# Altium PCB PX4FMUv2.4.6.PcbDoc (part 3 of 3)
Units mil, origin at the board's own origin, x right, y up, seen from the top; angles counter-clockwise.
Board outline 2695 x 2965 mil, 2 copper layers (Top, Bottom), stack 12.756 mil thick; 257 components, 261 nets, 1127 pads, 374 vias.
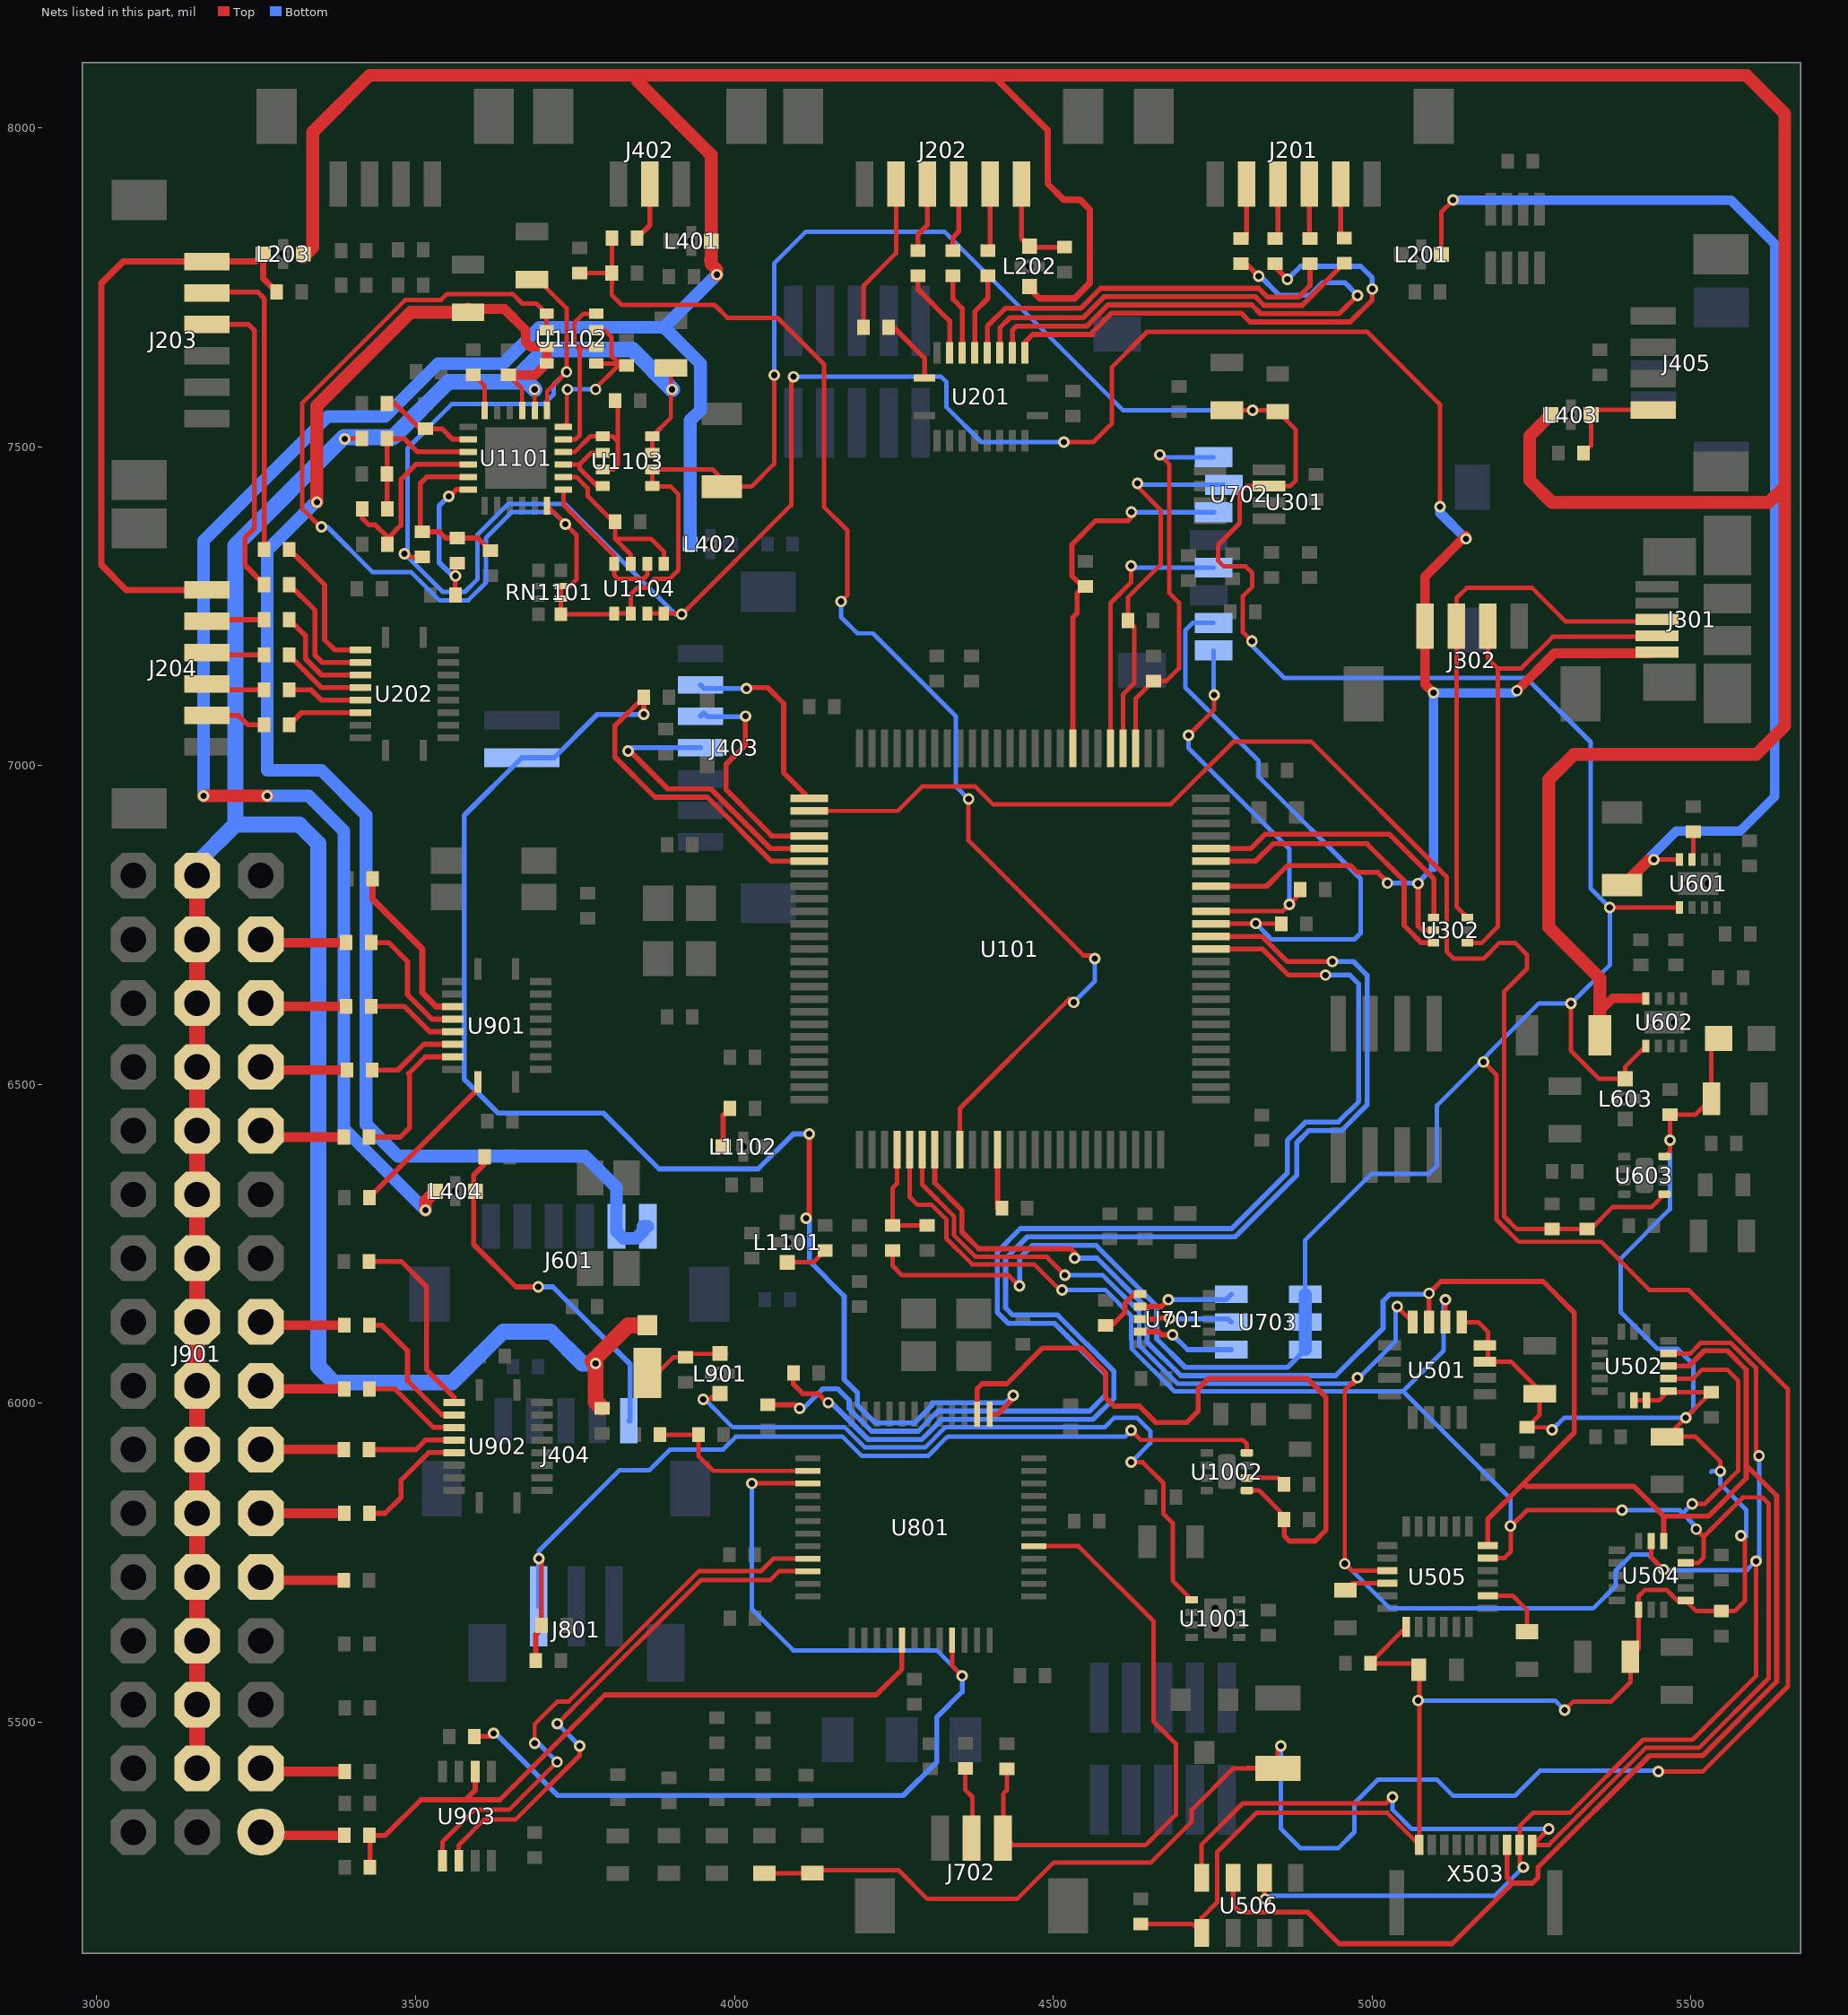
[diagram p3: the nets of this part, all layers, seen from the top]

## Via types
v1: diameter 18, hole 10, Top to Bottom, 374 vias

## Nets (pads, with @x,y where several pads share a name; then routed paths per layer and width w, separated by ;. In a path a pad name is that pad's centre, name@x,y a point inside that pad or via, vN(x,y) a via of type N, cw(c..) or ccw(c..) an arc to the next point about the centre after c; other vN are vias at no path point) (continued)
N$48: D404.C J405.1 L403.P$2 | length 165.6
  Top w7: D404.C@5331.72,7490.47 5343.53,7502.28 L403.P$2@5343.53,7550.47 5351.17,7558.11 J405.1@5441.04,7558.11
N$49: R915.P$1 U902.16 | length 188.4
  Top w8: R915.P$1@3427.28,5827.68 3452.34,5827.68 3477.34,5852.68 3477.34,5879.72 3520.46,5922.84 U902.16@3560.44,5922.84
N$50: C512.P$1 U505.10 | length 70.5
  Top w7: C512.P$1@4958.27,5707.21 4969.21,5718.15 U505.10@5024.22,5718.15
N$51: C515.P$1 U505.20 | length 104.8
  Top w7: U505.20@5181.7,5698.46 5220.65,5698.46 5242.96,5676.15 C515.P$1@5242.96,5641.9
N$52: 
N$53: R907.P$1 U902.15 | length 139.6
  Top w8: R907.P$1@3427.03,5927.68 3500.64,5927.68 3515.48,5942.52 U902.15@3560.44,5942.52
N$54: R1106.P$2 R1107.P$1 U1101.P$2 | length 150.4
  Top w8: R1107.P$1@3455.17,7568 3467.67,7568 3507.21,7528.46 R1106.P$2@3515.48,7528.46 3541.56,7528.46 3558.01,7512.01 U1101.P$2@3582.38,7512.01
N$55: C1109.P$1 R1109.P$2 R1110.P$1 U1101.P$3 | length 246.1
  Top w8: R1110.P$1@3455.48,7402.84 3455.17,7403.15 C1109.P$1@3455.17,7457.84 R1109.P$2@3455.17,7513 3482.02,7513 3502.7,7492.32 U1101.P$3@3582.38,7492.32
N$56: R1110.P$2 R1111.P$1 U1101.P$4 | length 294.9
  Top w8: R1110.P$2@3416.1,7402.84 3416.1,7388.61 3427.03,7377.68 3436.83,7377.68 3455.48,7359.03 R1111.P$1@3455.48,7355.82 ; R1111.P$1@3455.48,7347.22 R1111.P$1@3455.48,7355.82 ; U1101.P$4@3582.38,7472.64 3582.34,7472.68 3500.79,7472.68 3477.34,7449.23 3477.34,7412.89 3476.95,7412.5 3476.95,7377.29 R1111.P$1@3455.48,7355.82
N$57: J702.2 R710.P$1 | length 114.3
  Top w7: R710.P$1@4362.34,5427.51 4362.34,5393.62 4373.28,5382.68 4373.28,5323.57 4372.34,5322.63 J702.2@4371.94,5318.11
N$58: R916.P$1 U902.14 | length 158.2
  Top w8: R916.P$1@3427.28,6022.68 3467.65,6022.68 3528.12,5962.21 U902.14@3560.44,5962.21
N$59: R908.P$1 U902.13 | length 218.9
  Top w8: R908.P$1@3427.34,6122.68 3447.34,6122.68 3487.34,6082.68 3487.34,6035.82 3541.27,5981.89 U902.13@3560.44,5981.89
N$60: R917.P$1 U902.12 | length 305.8
  Top w8: R917.P$1@3427.03,6222.68 3477.34,6222.68 3517.34,6182.68 3517.34,6052.68 3560.44,6009.58 U902.12@3560.44,6001.58
N$61: R902.P$1 U901.20 | length 252.1
  Top w8: R902.P$1@3427.28,6322.68 3597.81,6493.21 U901.20@3597.81,6504.1
N$62: R911.P$1 U901.18 | length 235.4
  Top w8: R911.P$1@3427.03,6417.68 3475.96,6417.68 3490.34,6432.06 3490.34,6515.47 3488.82,6516.99 3515.3,6543.47 U901.18@3558.44,6543.47
N$63: R903.P$1 U901.17 | length 143.2
  Top w8: R903.P$1@3432.03,6522.68 3472.34,6522.68 3512.81,6563.15 U901.17@3558.44,6563.15
N$64: R912.P$1 U901.16 | length 144.2
  Top w8: R912.P$1@3430.72,6622.68 3482.37,6622.68 3522.21,6582.84 U901.16@3558.44,6582.84
N$65: R904.P$1 U901.15 | length 208.1
  Top w8: R904.P$1@3430.72,6722.68 3457.65,6722.68 3487.34,6692.99 3487.34,6640.82 3525.64,6602.52 U901.15@3558.44,6602.52
N$66: R913.P$1 U901.14 | length 268
  Top w10: R913.P$1@3432.43,6822.68 3432.43,6790.73 3510.48,6712.68 3510.48,6644.07 3532.34,6622.21 U901.14@3558.44,6622.21
N$67: R1113.P$2 R1114.P$1 U1101.P$6 | length 239.4
  Top w8: v1(3552.02,7422.68) 3552.34,7421.74 3563.87,7433.27 U1101.P$6@3582.38,7433.27 ; R1114.P$1@3562.34,7267.68 3562.34,7314.7 R1113.P$2@3565.48,7317.84
  Bottom w8: v1(3552.02,7422.68) 3536.95,7407.62 3536.95,7318.86 3563.13,7292.68 v1@3562.95,7297.69
  other v1: 3562.77,7297.68
N$68: J901.34 R911.P$2 | length 134.5
  Top w15: J901.34@3257.34,6427.68 3267.34,6417.68 R911.P$2@3387.65,6417.68
N$69: C1110.P$1 R1112.P$2 R1113.P$1 U1101.P$5 | length 275.4
  Top w8: U1101.P$5@3582.38,7452.95 3517.61,7452.95 3507.34,7442.68 3507.34,7370.05 R1112.P$2@3510.48,7366.91 3537.34,7366.91 3547.03,7357.22 R1113.P$1@3565.48,7357.22 3597.65,7357.22 C1110.P$1@3617.34,7337.53
N$70: R201.P$1 U201.20 | length 107.3
  Top w8: R201.P$1@4242.03,7687.68 4249.86,7687.68 4298.29,7639.25 U201.20@4298.29,7608.31
N$71: J901.13 R906.P$2 | length 132.4
  Top w15: J901.13@3257.34,5727.68 3262.34,5722.68 R906.P$2@3387.65,5722.68
N$72: J901.16 R915.P$2 | length 130.6
  Top w15: J901.16@3257.34,5827.68 R915.P$2@3387.9,5827.68
N$73: J901.19 R907.P$2 | length 130.3
  Top w15: J901.19@3257.34,5927.68 R907.P$2@3387.65,5927.68
N$74: J901.22 R916.P$2 | length 132.6
  Top w15: J901.22@3257.34,6027.68 3262.34,6022.68 R916.P$2@3387.9,6022.68
N$75: J901.25 R908.P$2 | length 132.7
  Top w15: J901.25@3257.34,6127.68 3262.34,6122.68 R908.P$2@3387.96,6122.68
N$77: J901.37 R903.P$2 | length 137.4
  Top w15: J901.37@3257.34,6527.68 3262.34,6522.68 R903.P$2@3392.65,6522.68
N$78: J901.40 R912.P$2 | length 136.1
  Top w15: J901.40@3257.34,6627.68 3262.34,6622.68 R912.P$2@3391.34,6622.68
N$79: J901.43 R904.P$2 | length 136.1
  Top w15: J901.43@3257.34,6727.68 3262.34,6722.68 R904.P$2@3391.34,6722.68
N$82: R208.P$1 U201.18 | length 141.5
  Top w8: R208.P$1@4287.89,7768.58 4287.89,7747.13 4337.66,7697.36 U201.18@4337.66,7647.68
N$83: R202.P$1 U201.17 | length 126.9
  Top w8: R202.P$1@4342.89,7768.58 4342.89,7731.74 4357.34,7717.29 U201.17@4357.34,7647.68
N$84: R209.P$1 U201.16 | length 129.4
  Top w8: U201.16@4377.03,7647.68 4377.03,7712.37 4397.58,7732.92 R209.P$1@4397.58,7768.58
N$85: R203.P$1 U201.15 | length 619.7
  Top w8: U201.15@4396.71,7647.68 4396.71,7689.3 4424.7,7717.29 4543.13,7717.29 4574.51,7748.67 4822.34,7748.67 4835.89,7735.12 4885.06,7735.12 4902.89,7752.94 R203.P$1@4902.89,7787.24
N$86: R210.P$1 U201.14 | length 632.8
  Top w8: U201.14@4416.4,7647.68 4416.4,7686.74 4432.34,7702.68 4547.34,7702.68 4547.34,7703.12 4579.89,7735.67 4816.95,7735.67 4830.51,7722.12 4890.45,7722.12 4956.32,7787.99 R210.P$1@4956.71,7787.99
N$87: R204.P$1 U201.13 | length 831.9
  Top w8: U201.13@4436.08,7647.68 4436.08,7683.04 4442.34,7689.3 4552.68,7689.3 4586.05,7722.67 4811.57,7722.67 4825.12,7709.12 4948.77,7709.12 v1(4977.34,7737.68) ; R204.P$1@4794.47,7787.24 4802.78,7787.24 4817.34,7772.68 v1@4822.34,7772.68
  Bottom w8: v1@4822.34,7772.68 4822.34,7770.24 4854.9,7737.68 4902.34,7737.68 4922.34,7757.68 4957.34,7757.68 v1(4977.34,7737.68)
  other v1: 4822.34,7767.68
N$88: R211.P$1 U201.12 | length 847.6
  Top w8: U201.12@4455.77,7647.68 4455.77,7664.06 4468.01,7676.3 4562.34,7676.3 4562.34,7680.58 4591.43,7709.67 4795.26,7709.67 4808.81,7696.12 4965.77,7696.12 5000.37,7730.71 v1(5000.37,7747.68) ; R211.P$1@4847.89,7787.24 4847.89,7782.13 v1(4867.34,7762.68)
  Bottom w8: v1(5000.37,7747.68) 5000.37,7765.24 4982.34,7783.27 4887.93,7783.27 ; 4887.93,7783.27 v1(4867.34,7762.68) 4887.93,7783.27
N$89: R207.P$1 U202.13 | length 203.5
  Top w8: R207.P$1@3302.03,7284.14 3342.34,7243.83 3342.34,7173.15 3353.6,7161.89 U202.13@3413.44,7161.89
N$90: R214.P$1 U202.12 | length 227.1
  Top w8: R214.P$1@3302.03,7339.14 3357.34,7283.83 3357.34,7197.68 3373.44,7181.58 U202.12@3413.44,7181.58
N$91: R205.P$1 U202.17 | length 119.3
  Top w8: R205.P$1@3302.03,7064.14 3321.04,7083.15 U202.17@3413.44,7083.15
N$92: R212.P$1 U202.16 | length 118.2
  Top w8: R212.P$1@3302.03,7119.14 3335.88,7119.14 3352.18,7102.84 U202.16@3413.44,7102.84
N$93: R206.P$1 U202.15 | length 133.3
  Top w8: R206.P$1@3302.03,7173.98 3302.03,7172.99 3352.5,7122.52 U202.15@3413.44,7122.52
N$94: R213.P$1 U202.14 | length 168.6
  Top w8: R213.P$1@3302.03,7229.14 3327.34,7203.83 3327.34,7167.68 3352.81,7142.21 U202.14@3413.44,7142.21
N$95: R704.P$2 U701.6 | length 82.5
  Top w8: R704.P$2@4582.34,6122.48 4592.14,6122.48 4612.34,6142.68 4612.34,6156.83 4627.04,6171.54 U701.6@4636.24,6171.54
N$96: R617.P$1 U601.7 | length 44.8
  Top w7: U601.7@5502.03,6852.68 5504.13,6854.79 R617.P$1@5504.09,6896.6 R617.P$1@5504.09,6896.6
N$97: C1105.P$1 U1101.P$18 U1102.P$1 U1102.P$3 | length 281.8
  Top w7: U1101.P$18@3731.98,7531.69 3737.34,7537.05 v1@3737.34,7592.68 ; v1(3782.34,7590.28) 3781.81,7591.46 3815.79,7625.44 3822.57,7627.84 C1105.P$1@3819.57,7630.84 ; U1102.P$1@3783.48,7630.84 C1105.P$1@3819.57,7630.84 ; U1102.P$3@3783.48,7682.84 3797.18,7682.84 3807.34,7672.68 3807.34,7643.07 C1105.P$1@3819.57,7630.84
  Bottom w7: v1@3737.34,7592.68 v1(3738.13,7590.28) v1(3782.34,7590.28)
N$98: D403.C J404.1 L404.P$2 | length 547.1
  Top w8: D403.C@3607.96,6375.17 3591.15,6358.36 3591.15,6249.18 3657.65,6182.68 v1(3692.34,6182.68)
  Bottom w8: v1(3692.34,6182.68) 3715.36,6182.68 3836.56,6061.49 3836.56,5972.68 J404.1@3834.39,5972.68
N$99: J901.4 R910.P$2 | length 133.8
  Top w15: J901.4@3257.34,5427.68 3262.34,5422.68 R910.P$2@3389.05,5422.68
N$100: D203.C J203.1 J204.1 L203.P$2 | length 965
  Top w10: J204.1@3172.77,7275.71 3046.08,7275.71 3007.34,7314.45 3007.34,7756.93 3041.12,7790.71 J203.1@3172.77,7790.71 3248.87,7790.71 L203.P$2@3260.84,7802.68 3260.84,7764.46 D203.C@3282.34,7742.96
N$101: D202.C J202.1 L202.P$2 | length 158.3
  Top w8: J202.1@4450.37,7912.25 4450.37,7827.29 L202.P$2@4462.89,7814.77 4464.39,7813.27 D202.C@4517.89,7813.27
N$102: L1102.P$2 R1102.P$2 | length 64.4
  Top w8: L1102.P$2@3982.34,6402.68 3982.34,6452.06 R1102.P$2@3992.96,6462.68
N$103: L1101.P$2 R1101.P$2 | length 66.9
  Top w7: L1101.P$2@4083.09,6221.18 4123.83,6221.18 R1101.P$2@4142.34,6239.69
N$104: C1002.P$1 U1002.6 | length 62.7
  Top w7: U1002.6@4803.84,5883.15 4852.18,5883.15 C1002.P$1@4862.34,5872.99
N$105: R1115.P$2 U1101.P$24 | length 63.1
  Top w7: R1115.P$2@3590.48,7613.15 3607.97,7595.66 U1101.P$24@3607.97,7557.28
N$106: C1106.P$1 U1101.P$16 U1103.P$1 U1103.P$3 | length 228.6
  Top w7: U1101.P$16@3731.98,7492.32 3749.78,7492.32 3774.14,7516.68 U1103.P$1@3793.34,7516.68 3808.97,7516.68 3817.34,7508.31 ; U1103.P$3@3793.34,7464.68 3810.09,7464.68 3817.34,7471.93 3817.34,7508.31 ; C1106.P$1@3812.65,7572.68 3817.34,7567.99 3817.34,7508.31
N$107: C1107.P$1 U1101.P$14 U1104.P$1 U1104.P$3 | length 297
  Top w7: U1101.P$14@3731.98,7452.95 3752.07,7452.95 3770.09,7434.93 3770.09,7422.68 3810.09,7382.68 C1107.P$1@3812.65,7382.68 3812.65,7355.82 ; U1104.P$3@3837.48,7316.84 3837.48,7330.99 3812.65,7355.82 ; U1104.P$1@3889.48,7316.84 3889.48,7335.54 3869.2,7355.82 3812.65,7355.82
N$109: U1101.P$13 U1104.P$2 U1104.P$4 | length 241.6
  Top w7: U1101.P$13@3731.98,7433.27 3731.98,7409.18 3811.48,7329.68 U1104.P$4@3811.48,7316.84 3811.48,7299.32 3817.71,7293.09 3857.28,7293.09 3863.48,7299.29 U1104.P$2@3863.48,7316.84
N$110: D903.C D904.CATHODE L901.P$1 | length 143.5
  Top w7: D904.CATHODE@3863.13,6030.99 3904.82,6072.68 D903.C@3923.13,6072.68 3928.13,6077.68 L901.P$1@3987.34,6077.68
N$113: U1101.P$15 U1103.P$2 U1103.P$4 | length 122.8
  Top w7: U1101.P$15@3731.98,7472.64 3757.3,7472.64 ; U1103.P$4@3793.34,7438.68 3784.69,7438.68 3757.3,7466.07 3757.3,7472.64 ; U1103.P$2@3793.34,7490.68 3775.34,7490.68 3757.3,7472.64
N$115: U1101.P$17 U1102.P$2 U1102.P$4 | length 278.5
  Top w7: U1101.P$17@3731.98,7512.01 3751.08,7512.01 3757.3,7518.23 3757.3,7652.72 3753.18,7656.84 ; U1102.P$2@3783.48,7656.84 3753.18,7656.84 ; U1102.P$4@3783.48,7708.84 3763.5,7708.84 3748.72,7694.06 3748.72,7661.3 3753.18,7656.84
OTG_DM1: J301.D- J302.3 U302.1 | length 796.4
  Top w7: U302.1@5149.71,6722.36 5172.34,6722.36 5197.34,6747.36 5197.34,7097.53 5197.25,7097.62 5197.25,7152.59 5197.34,7152.68 ; J302.3@5181.67,7218.98 5181.67,7168.35 5197.34,7152.68 ; J301.D-@5437.1,7202.09 5283.47,7202.09 5234.06,7152.68 5197.34,7152.68
OTG_DP1: J301.D+ J302.2 U302.3 | length 841.7
  Top w7: U302.3@5149.71,6761.74 5132.45,6779 J302.2@5132.45,7218.98 5132.45,7262.79 5148.52,7278.86 5251.16,7278.86 5303.52,7226.5 5435.92,7226.5 J301.D+@5437.1,7227.68
OTG_FS_DM: U101.70 U302.6 | length 465.9
  Top w8: U101.70@4747.3,6850.48 4817.51,6850.48 4844.71,6877.68 4992.34,6877.68 5050.53,6819.49 5050.53,6749.49 5077.66,6722.36 U302.6@5096.57,6722.36
OTG_FS_DP: U101.71 U302.4 | length 449.6
  Top w8: U101.71@4747.3,6870.16 4809.82,6870.16 4832.34,6892.68 5027.34,6892.68 5097.34,6822.68 5097.34,6762.51 U302.4@5096.57,6761.74
PB2-BOOT1: R102.P$1 U101.37 | length 91.6
  Top w8: R102.P$1@4412.65,6306.11 U101.37@4412.65,6397.72
PPM-SBUS-PROT: J901.1 R909.P$2 | length 132.6
  Top w10: J901.1@3257.34,5327.68 J901.1@3262.34,5322.68
  Top w15: J901.1@3262.34,5322.68 R909.P$2@3387.9,5322.68
PPM_INPUT: D901.C R909.P$1 U801.29 U903.2 | length 1089.8
  Top w8: D901.C@3428.43,5272.68 3428.43,5321.53 R909.P$1@3427.28,5322.68 3452.65,5322.68 3508.27,5378.3 3578.16,5378.3 ; U903.2@3593.45,5422.56 3593.45,5393.59 3578.16,5378.3 ; U801.29@4262.81,5628.42 4262.81,5583.15 4222.54,5542.88 3796.91,5542.88 3632.33,5378.3 3578.16,5378.3
PRESSURE_SENS: C401.P$1 R403.P$2 R406.P$1 U101.34 | length 2062
  Top w7: C401.P$1@3757.34,7772.68 R403.P$2@3807.65,7772.68 3807.65,7738.16 3823.13,7722.68 3968.98,7722.68 3988.98,7702.68 4067.49,7702.68 4140.34,7629.84 4140.34,7406.17 4177.34,7369.17 4177.34,7267.68 v1(4167.34,7257.68) ; 3807.96,7756.11 R406.P$1@3807.96,7827.68 ; U101.34@4353.6,6397.72 4353.6,6462.68 4524.86,6633.94 v1@4529.34,6633.94 ; v1(4367.34,6947.68) 4367.34,6882.68 4547.34,6702.68 v1@4562.97,6702.68
  Bottom w7: v1(4167.34,7257.68) 4167.34,7233.13 4192.79,7207.68 4217.34,7207.68 4347.34,7077.68 4347.34,6967.68 v1(4367.34,6947.68) ; v1(4532.26,6628.94) 4565.26,6661.94 v1(4565.26,6697.68)
PRESSURE_SENS_IN: J402.2 R406.P$2 | length 92.9
  Top w8: R406.P$2@3847.34,7827.68 3867.34,7847.68 J402.2@3867.34,7912.25
RGB_LED_3: U701.9 U703.C1 | length 154.7
  Top w8: U701.9@4636.24,6112.48 4665.14,6112.48 4669.94,6107.68 v1(4687.34,6107.68)
  Bottom w8: v1(4687.34,6107.68) 4710.65,6084.37 U703.C1@4779.27,6084.37
RGB_LED_4: U701.8 U703.C2 | length 238.7
  Top w8: U701.8@4636.24,6132.17 4664.23,6132.17 4665.8,6133.74 v1(4682.34,6133.74)
  Bottom w8: v1(4682.34,6133.74) v1@4682.34,6132.68 ; U703.C2@4779.27,6127.68 U703.C2@4774.27,6132.68 ; v1@4682.34,6132.68 U703.C2@4774.27,6132.68 ; v1@4682.34,6132.68 U703.C2@4774.27,6132.68
RGB_LED_14: U701.7 U703.C3 | length 151
  Top w8: U701.7@4636.24,6151.86 4669.83,6151.86 v1(4680.65,6162.68)
  Bottom w8: v1(4680.65,6162.68) 4770.96,6162.68 U703.C3@4779.27,6170.99
RSSI_IN: R901.P$1 U801.15 U801.33 | length 1665
  Top w7: v1(4027.34,5874.49) U801.15@4115.17,5874.49 ; U801.33@4341.55,5628.42 4341.55,5588.47 v1(4357.34,5572.68)
  Top w8: R901.P$1@3592.03,5477.68 3617.34,5477.68 v1(3622.34,5482.68)
  Bottom w7: v1(4027.34,5874.49) 4027.34,5677.68 4092.34,5612.68 4317.34,5612.68 v1(4357.34,5572.68)
  Bottom w8: v1(3622.34,5482.68) 3622.65,5485.28 3722.93,5385 4264.65,5385 4317.34,5437.68 4317.34,5507.68 4357.34,5547.68 v1(4357.34,5572.68)
SAFETY: J702.3 R713.P$1 U801.41 | length 958.1
  Top w7: R713.P$1@4427.34,5426.79 4427.34,5393.47 4421.55,5387.68 4421.55,5322.63 4436.82,5307.36 4645.05,5307.36 4692.34,5354.65 4692.34,5466.17 4657.34,5501.17 4657.34,5658.46 4539.74,5776.06 U801.41@4469.51,5776.06
SBUS_INPUT: U801.22 U903.6 | length 828.6
  Top w7: U903.6@3567.85,5282.8 3567.85,5307.36 3608.17,5347.68 3657.03,5347.68 3757.34,5447.99 v1(3757.34,5462.68) ; v1(3722.34,5497.68) 3745.34,5520.68 3745.19,5520.68 3947.19,5722.68 4056.04,5722.68 4070.05,5736.69 U801.22@4115.17,5736.69
  Bottom w7: v1(3722.34,5497.68) v1(3757.34,5462.68)
SBUS_OUTPUT: U801.21 U903.5 | length 874.5
  Top w7: U903.5@3542.26,5282.8 3542.26,5312.6 3592.34,5362.68 3646.84,5362.68 v1(3721.84,5437.68) ; v1(3686.71,5466.89) 3686.71,5497.05 3722.34,5532.68 3740.22,5532.68 3944.23,5736.69 4041.35,5736.69 4061.04,5756.38 U801.21@4115.17,5756.38
  Bottom w7: v1(3686.71,5466.89) 3692.66,5466.89 v1@3721.87,5437.68
SDIO_CK: U101.80 U301.5 | length 430
  Top w7: U101.80@4589.82,7027.64 4589.82,7255.16 4622.34,7287.68 v1(4622.34,7313.53)
  Bottom w7: v1(4622.34,7313.53) 4625.15,7310.71 U301.5@4751.83,7310.71
SDIO_CMD: R303.P$1 U101.83 U301.3 | length 714.3
  Top w8: U101.83@4530.77,7027.64 4530.77,7232.68 4537.45,7239.36 4537.45,7270.56 R303.P$1@4542.34,7275.45 ; R303.P$1@4550.45,7281.04 4545.98,7281.04 4529.34,7297.68 4529.34,7346.99 4566.72,7384.37 4617.34,7384.37 4627.34,7394.37 v1@4627.34,7397.68
  Bottom w8: v1@4627.34,7397.68 v1(4622.65,7397.68) v1@4622.65,7397.32 ; v1@4622.65,7397.32 U301.3@4751.83,7397.32 v1@4622.65,7397.32
SDIO_D0: R304.P$1 U101.65 U301.7 | length 927.5
  Top w7: U101.65@4747.3,6752.05 R304.P$1@4857.65,6752.05
  Bottom w7: U301.7@4751.83,7224.1 4718.76,7224.1 4707.34,7212.68 4707.34,7122.68 4822.34,7007.68 4822.34,6982.68 4982.34,6822.68 4982.34,6737.68 4972.34,6727.68 4842.82,6727.68 v1(4817.82,6752.68)
SDIO_D1: R305.P$1 U101.66 U301.8 | length 640.7
  Top w7: v1(4712.34,7047.68) 4752.62,7087.96 v1(4752.62,7111.06) ; U101.66@4747.3,6771.74 4747.3,6772.36 4860.17,6772.36 v1(4870.49,6782.68) 4887.65,6799.84 R305.P$1@4887.65,6805.79
  Bottom w7: v1(4712.34,7047.68) 4712.34,7027.68 4870.49,6869.53 v1(4870.49,6782.68) ; U301.8@4751.83,7180.79 4751.83,7116.06 4749.72,7113.96 v1(4752.62,7111.06)
SDIO_D2: R301.P$1 U101.78 U301.1 | length 598.6
  Top w7: U101.78@4629.19,7027.64 4629.19,7104.84 R301.P$1@4657.34,7132.99 4677.65,7132.99 4697.34,7152.68 4697.34,7255.65 4682.34,7270.65 4682.34,7472.68 v1(4667.34,7487.68)
  Bottom w7: v1(4667.34,7487.68) 4671.08,7483.94 U301.1@4751.83,7483.94
SDIO_D3: R302.P$1 U101.79 U301.2 | length 595.5
  Top w7: U101.79@4609.51,7027.64 4609.51,7112.05 4627.34,7129.88 4627.34,7217.99 R302.P$1@4617.65,7227.68 4617.65,7264.44 4668.56,7315.35 4668.56,7401.46 v1@4632.34,7437.68
  Bottom w7: v1@4632.34,7437.68 4632.34,7440.28 4632.69,7440.63 U301.2@4767.58,7440.63
  other v1: 4632.34,7442.68
SERIAL1_CTS: J201.4 R211.P$2 | length 90.5
  Top w8: R211.P$2@4852.73,7821.74 J201.4@4852.73,7912.25
SERIAL1_RTS: J201.5 R204.P$2 | length 94.7
  Top w8: R204.P$2@4794.47,7826.62 4803.52,7826.62 J201.5@4803.52,7912.25
SERIAL1_RX: J201.3 R203.P$2 | length 86
  Top w8: J201.3@4901.95,7912.25 4901.95,7827.56 R203.P$2@4902.89,7826.62
SERIAL1_TX: J201.2 R210.P$2 | length 89.5
  Top w8: R210.P$2@4951.16,7822.76 J201.2@4951.16,7912.25
SERIAL2_CTS: J202.4 R208.P$2 | length 110.4
  Top w8: R208.P$2@4287.89,7807.96 4287.89,7833.23 4302.73,7848.07 J202.4@4302.73,7912.25
SERIAL2_RTS: J202.5 R201.P$2 | length 245.6
  Top w7: R201.P$2@4202.65,7687.68 4202.65,7752.99 4253.52,7803.86 J202.5@4253.52,7912.25
SERIAL2_RX: J202.3 R202.P$2 | length 108
  Top w8: R202.P$2@4342.89,7807.96 4342.89,7828.78 4351.95,7837.84 J202.3@4351.95,7912.25
SERIAL2_TX: J202.2 R209.P$2 | length 105.8
  Top w8: R209.P$2@4397.58,7807.96 4401.16,7811.54 J202.2@4401.16,7912.25
SERIAL3_RX: J203.3 R207.P$2 | length 495.9
  Top w8: J203.3@3172.77,7692.29 3237.73,7692.29 3247.34,7682.68 3247.34,7372.68 3232.34,7357.68 3232.34,7314.45 R207.P$2@3262.65,7284.14
SERIAL3_TX: J203.2 R214.P$2 | length 488.3
  Top w8: J203.2@3172.77,7741.5 3174.23,7742.96 3252.34,7742.96 3262.65,7732.65 R214.P$2@3262.65,7339.14
SERIAL4_RX: J204.3 R206.P$2 | length 91.3
  Top w8: J204.3@3172.77,7177.29 3176.08,7173.98 R206.P$2@3262.65,7173.98
SERIAL4_TX: J204.2 R213.P$2 | length 91
  Top w8: J204.2@3172.77,7226.5 3175.41,7229.14 R213.P$2@3262.65,7229.14
SERIAL5_RX: J204.5 R205.P$2 | length 96
  Top w8: J204.5@3172.77,7078.86 3222.34,7078.86 3237.06,7064.14 R205.P$2@3262.65,7064.14
SERIAL5_TX: J204.4 R212.P$2 | length 93.6
  Top w8: J204.4@3172.77,7128.07 3181.7,7119.14 R212.P$2@3262.65,7119.14
SERIAL_FMU_TO_IO: R804.P$2 U101.63 | length 2078.6
  Top w8: R804.P$2@4052.34,5997.99 4096.72,5997.99 v1(4102.34,5992.37) ; U101.63@4747.3,6712.68 4828.2,6712.68 4869.14,6671.74 v1(4927.03,6671.74)
  Bottom w8: v1(4102.34,5992.37) 4107.34,5989.18 4107.34,5991.52 4138.49,6022.68 4162.34,6022.68 4180,6005.02 4180,5991.75 4215.32,5956.42 4288.38,5956.42 4304.5,5972.54 4304.5,5973.05 4319.44,5987.99 4557.18,5987.99 4582.34,6013.15 4582.34,6044.96 4501.62,6125.68 4429.34,6125.68 4412.34,6142.68 4412.34,6237.68 4448.78,6274.12 4780.08,6274.12 4867.34,6361.38 4867.34,6412.68 4896.04,6441.38 4947.34,6441.38 4979.34,6473.38 4979.34,6657.68 4965.28,6671.74 v1(4927.03,6671.74)
SERIAL_IO_TO_FMU: R803.P$2 U101.64 | length 2090.5
  Top w8: R803.P$2@4092.65,6047.68 4092.65,6029.97 4107.34,6015.28 4131.37,6015.28 v1@4146.43,6000.22 ; U101.64@4747.3,6732.37 4827.65,6732.37 4867.03,6692.99 v1@4937.55,6692.99
  Bottom w8: v1@4142.34,6004.31 v1(4147.34,6001.12) 4152.24,6001.12 4209.94,5943.42 4293.77,5943.42 4317.5,5967.16 4317.5,5967.67 4324.82,5974.99 4562.57,5974.99 4595.34,6007.76 4595.34,6050.35 4507,6138.68 4436.34,6138.68 4425.34,6149.68 4425.34,6227.07 4459.39,6261.12 4785.46,6261.12 4882.02,6357.68 4882.02,6408.98 4900.72,6427.68 4952.02,6427.68 4992.34,6468 4992.34,6671.74 4971.09,6692.99 v1(4938.14,6692.99) v1@4937.55,6692.99
SPI_EXT_MISO: J403.3 U101.4 | length 372.6
  Top w8: v1(4017.34,7077.68) 4017.34,7032.68 3986.93,7002.27 3986.93,6962.68 4039.51,6910.1 4039.51,6909.53 4057.34,6891.7 4057.34,6889.85 U101.4@4117.38,6889.85
  Bottom w8: J403.3@3946.91,7077.68 J403.3@3951.91,7082.68 ; v1(4017.34,7077.68) 4013.84,7077.01 J403.3@3957.58,7077.01 ; J403.3@3951.91,7082.68 J403.3@3957.58,7077.01 ; J403.3@3951.91,7082.68 J403.3@3957.58,7077.01
SPI_EXT_MOSI: J403.4 U101.5 | length 473.5
  Top w8: v1@3830.79,7028.27 3895.47,6963.59 3963.16,6963.59 4056.59,6870.16 U101.5@4117.38,6870.16
  Bottom w8: v1@3830.79,7028.27 v1(3833.13,7023.3) 3838.3,7028.47 J403.4@3946.91,7028.47
SPI_EXT_SCK: J403.2 U101.1 | length 309.6
  Top w8: v1(4018.84,7121.07) 4019.66,7122.68 4052.34,7122.68 4077.34,7097.68 4077.34,6988.94 U101.1@4117.38,6948.9
  Bottom w8: J403.2@3946.91,7126.9 3952.74,7121.07 v1(4018.84,7121.07)
SPI_INT_MISO: U101.31 U501.4 U502.4 U504.7 U505.9 U506.6 X503.9 | length 3923.6
  Top w7: U101.31@4294.54,6397.72 4294.54,6343.24 4344.34,6293.44 4344.34,6263.79 4377.95,6230.18 4489.43,6230.18 v1(4518.43,6201.18) ; U506.6@4831.33,5255.99 4831.33,5221.29 v1@4832.34,5220.28 ; 4970.65,6030.99 v1(4977.34,6040.28) 4957.34,6020.28 v1(4957.34,5748.57) 4968.08,5737.83 U505.9@5024.22,5737.83 ; v1@5041.15,6150.28 U501.4@5063.95,6127.48 ; v1(5237.34,5272.68) 5231.71,5278.31 X503.9@5231.71,5307.68 5231.71,5337.05 5252.34,5357.68 5310.37,5357.68 5425.37,5472.68 5502.81,5472.68 5602.34,5572.21 v1(5602.34,5752.68) ; U504.7@5437.96,5784.22 5437.96,5758.72 v1(5457.34,5739.34) ; U502.4@5464.9,6078.37 5499.3,6078.37 5516.11,6095.18 5562.51,6095.18 5602.24,6055.46 v1@5602.24,5912.78
  Bottom w7: v1(4518.43,6201.18) 4577.76,6201.18 4634.84,6144.1 4634.84,6091.21 4695.05,6030.99 4970.65,6030.99 5037.34,6097.68 5037.34,6150.28 v1@5041.15,6150.28 ; v1@4831.33,5217.68 4841.33,5227.68 5192.34,5227.68 v1(5237.34,5272.68) ; v1(4957.34,5748.57) 4962.34,5744.49 5028.4,5678.43 5346.86,5678.43 5382.34,5713.91 5382.34,5737.68 5407.34,5762.68 5433.23,5762.68 v1@5457.34,5738.57 ; v1(5457.34,5739.34) v1@5457.34,5738.57 ; v1@5602.24,5912.78 5607.14,5917.68 v1(5607.14,5917.52) 5607.14,5757.48 v1(5602.34,5752.68) 5588.23,5738.57 v1@5457.34,5738.57
  other v1: 4832.34,5222.68 5039.61,6151.83
SPI_INT_MOSI: U101.32 U501.3 U502.3 U504.6 U505.24 U506.7 X503.8 | length 4081.1
  Top w8: U101.32@4314.23,6397.72 4314.23,6345.79 4356.84,6303.18 4356.84,6268.97 4383.13,6242.68 4527.34,6242.68 4533.72,6236.3 v1(4533.72,6227.68) ; U506.7@4782.11,5255.99 4782.11,5212.91 4792.74,5202.28 4899.09,5202.28 4948.69,5152.68 5125.65,5152.68 5220.65,5247.68 ; U501.3@5089.54,6127.48 v1(5089.54,6172.68) 5108.09,6191.23 5268.28,6191.23 5317.34,6142.17 5317.34,5954.1 5237.34,5874.1 ; U505.24@5181.7,5777.2 5181.7,5818.46 5237.34,5874.1 ; X503.8@5212.03,5307.68 5212.03,5256.3 5220.65,5247.68 ; U504.6@5457.65,5784.22 5457.65,5823.12 ; U502.3@5464.9,6058.68 5497.29,6058.68 5521.29,6082.68 5557.34,6082.68 5587.14,6052.88 5587.14,5902.88 ; 5220.65,5247.68 5251.4,5247.68 5260.53,5256.81 5260.53,5272.68 5435.53,5447.68 5518.64,5447.68 5634.78,5563.83 5634.78,5855.24 5587.14,5902.88 ; 5237.34,5874.1 5241.63,5869.81 5410.96,5869.81 5457.65,5823.12 ; 5457.65,5823.12 5527.78,5823.12 5587.14,5882.48 5587.14,5902.88
  Bottom w8: v1(4533.72,6227.68) 4568.93,6227.68 4647.34,6149.28 4647.34,6096.39 4700.23,6043.49 4943.15,6043.49 5017.34,6117.68 5017.34,6160.28 5028.05,6170.99 5085.65,6170.99 5087.34,6172.68 v1(5089.54,6172.68)
SPI_INT_SCK: U101.30 U501.2 U502.2 U504.4 U505.23 U506.8 X503.10 | length 3962.1
  Top w7: U101.30@4274.86,6397.72 4274.86,6323.75 4287.34,6311.27 4309.54,6311.27 4332.34,6288.47 4332.34,6258.82 4372.98,6218.18 4470.22,6218.18 4512.34,6176.06 v1(4513.96,6177.68) ; U506.8@4732.9,5255.99 4732.9,5308.24 4797.34,5372.68 5022.09,5372.68 v1(5032.09,5382.68) ; U501.2@5115.14,6127.48 v1(5115.14,6162.68) v1@5115.14,6165.48 ; U505.23@5181.7,5757.52 5207.8,5757.52 5217.96,5767.68 5217.96,5807.28 5243.36,5832.68 v1(5392.34,5832.68) ; X503.10@5251.4,5307.68 X503.10@5252.34,5307.68 ; v1(5277.34,5332.68) X503.10@5252.34,5307.68 ; U502.2@5464.9,6038.99 5503.65,6038.99 5517.54,6052.88 5557.14,6052.88 5574.64,6035.38 5574.64,5894.98 5522.34,5842.68 v1(5502.34,5842.68) ; U504.4@5491.9,5749.97 5511.95,5749.97 5520.47,5758.5 5520.47,5790.84 5520.33,5790.98 ; v1(5508.63,5802.68) 5520.33,5790.98 ; X503.10@5252.34,5307.68 5277.34,5307.68 5429.84,5460.18 5513.46,5460.18 5622.28,5569.01 5622.28,5842.74 5612.34,5852.68 5582.65,5852.68 5582.34,5852.99 5520.33,5790.98
  Bottom w7: v1@4512.34,6176.06 v1(4513.96,6177.68) 4582.32,6177.68 4622.34,6137.66 4622.34,6100 4622.84,6099.5 4622.84,6086.24 4690.08,6018.99 5048.65,6018.99 ; v1(5032.09,5382.68) 5032.34,5384.49 5032.34,5362.68 5062.34,5332.68 v1(5277.34,5332.68) ; v1@5115.14,6165.48 5115.73,6165.48 5116.79,6163.63 5117.34,6162.68 5112.34,6157.68 5112.34,6082.68 5048.65,6018.99 ; v1@5217.96,5807.28 5217.5,5807.68 5217.5,5850.14 5048.65,6018.99 ; v1(5392.34,5832.68) 5482.34,5832.68 5487.34,5827.68 ; v1(5502.34,5842.68) 5487.34,5827.68 ; v1(5508.63,5802.68) 5504.09,5802.68 5504.09,5810.93 5487.34,5827.68
  other v1: 5217.34,5807.68
VBAT: B601.1 R608.P$1 U101.6 U801.1 | length 2687.3
  Top w8: v1(3858.13,7080.55) 3857.96,7080.55 R608.P$1@3857.96,7107.68 3812.65,7062.37 3812.65,7013.64 3875.7,6950.59 3957.77,6950.59 4057.34,6851.03 4057.34,6850.48 U101.6@4117.38,6850.48 ; v1(4112.34,6290.19) 4117.38,6295.23 v1(4117.38,6422.68) ; U801.1@4400.61,5982.76 4412.53,5982.76 4439.35,6009.58 v1(4437.34,6012.79)
  Bottom w8: v1(3858.13,7080.55) 3785.21,7080.55 3717.34,7012.68 B601.1@3666.71,7012.68 3576.21,6922.18 3576.21,6508.46 3629.48,6455.18 3794.48,6455.18 3881.98,6367.68 4037.34,6367.68 4092.34,6422.68 v1(4117.38,6422.68) ; v1(4112.34,6290.19) v1@4113.58,6291.44 ; v1@4112.34,6292.68 v1@4113.58,6291.44 ; 4310.25,5997.18 4282.48,5969.42 4220.71,5969.42 4193,5997.13 4193,6017.02 4172.34,6037.68 4172.34,6168.22 4117.87,6222.68 4117.87,6287.15 v1@4113.58,6291.44 ; 4310.25,6001.18 4425.72,6001.18 v1(4437.34,6012.79)
VBUS: C1103.P$1 J301.VBUS J302.1 R1112.P$1 U101.68 U302.5 U1101.P$19 U1104.P$7 U1104.P$8 | length 4767.9
  Top w7: v1(3482.34,7332.68) 3487.49,7327.53 R1112.P$1@3510.48,7327.53 ; C1103.P$1@3682.34,7762.68 3691.72,7762.68 3736.72,7717.68 v1(3736.72,7617.66) 3706.39,7587.33 U1101.P$19@3706.39,7557.28 ; U1104.P$7@3863.48,7238.84 U1104.P$8@3889.48,7238.84 3916.77,7238.84 v1@3917.93,7237.68 ; v1(3917.34,7237.68) v1@3917.93,7237.68 ; v1(4092.65,7610) 4089.01,7606.36 4089.01,7408.76 v1@3917.93,7237.68 ; v1(4516.99,7507.68) 4562.97,7507.68 4592.34,7537.05 4592.34,7625.38 4647.54,7680.58 4992.47,7680.58 5106.71,7566.34 v1(5106.71,7406.17)
  Top w8: U101.68@4747.3,6811.11 4834.98,6811.11 4867.16,6843.29 4966.73,6843.29 4977.34,6832.68 5009.22,6832.68 5024.22,6817.68 v1(5024.22,6816.04) ; v1(5072.34,6815.28) 5072.34,6748.98 5079.27,6742.05 U302.5@5096.57,6742.05
  Top w15: v1(5096.57,7114.65) 5083.24,7127.98 J302.1@5083.24,7218.98 5083.24,7296.72 5147.34,7360.82 v1(5147.34,7355.93) ; v1(5227.34,7117.68) 5286.16,7176.5 J301.VBUS@5437.1,7176.5
  Bottom w7: v1(3736.72,7617.66) 3716.55,7597.49 3716.55,7582.68 3701.55,7567.68 3557.34,7567.68 3487.34,7497.68 3487.34,7332.68 v1(3482.34,7332.68) 3542.34,7272.68 3577.34,7272.68 3597.34,7292.68 3597.34,7362.68 3645.51,7410.86 3734.16,7410.86 3907.34,7237.68 v1(3917.34,7237.68) ; v1(4092.65,7610) 4324.39,7610 4332.34,7602.05 4332.34,7562.68 4387.34,7507.68 v1(4516.99,7507.68) v1@4520.92,7507.68
  Bottom w8: v1(5024.22,6816.04) v1@5071.58,6816.04 ; v1(5072.34,6815.28) v1@5071.58,6816.04 ; 5096.57,6841.03 v1@5071.58,6816.04
  Bottom w15: 5096.57,6841.03 v1(5096.57,7114.65) 5096.97,7114.25 5222.34,7114.25 v1(5227.34,7117.68) ; v1(5106.71,7406.17) 5106.71,7396.56 v1(5147.34,7355.93)
VDD_3V3_SENSORS: C501.P$1 C502.P$1 C503.P$1 C506.P$1 C507.P$1 C508.P$1 C511.P$1 C513.P$1 C514.P$1 C605.P$1 C617.P$1 R621.2 U501.1 U501.15 U501.16 U502.1 U502.15 U502.16 U504.1 U504.14 U505.13 U506.1 U603.8 X503.1 | length 3621.8
  Top w7: C508.P$1@4637.34,5183.3 4718.97,5183.3 U506.1@4732.9,5169.37 4732.9,5193.24 4757.34,5217.68 4757.34,5296.5 4818.52,5357.68 5024.23,5357.68 X503.1@5074.23,5307.68 5074.23,5581.57 C513.P$1@5073.43,5582.37 5063.43,5592.37 C514.P$1@4997.65,5592.37 4997.65,5593.15 U505.13@5053.75,5649.25 ; U501.1@5140.73,6127.48 5166.7,6127.48 5181.7,6112.48 5181.7,6070.04 U501.15@5177.14,6065.48 5218.08,6065.48 5262.96,6020.6 C501.P$1@5262.96,6015.28 5262.96,5981.97 C502.P$1@5243.36,5962.37 5278.89,5962.37 v1(5282.65,5958.61) ; v1(5302.34,5519.07) 5315.95,5532.68 5375.37,5532.68 5405.36,5562.67 C506.P$1@5405.36,5602.68 5418.27,5615.59 U504.14@5418.27,5676.34 5418.27,5697.68 5427.8,5707.21 5462.45,5707.21 5478.75,5690.91 U504.1@5491.9,5690.91 5508.63,5674.18 C507.P$1@5547.96,5674.18 5568.64,5674.18 5584.84,5690.38 5584.84,5786.27 v1(5578.74,5792.37) ; U502.15@5410.96,6004.74 U502.16@5430.65,6004.74 5450.33,6004.74 U502.1@5464.9,6019.31 5466.53,6017.68 C503.P$1@5532.34,6017.68 v1(5492.34,5977.68) 5462.96,5948.3 C511.P$1@5462.96,5947.68 5507.54,5947.68 5546.47,5908.75 v1(5546.47,5893.53) ; U603.8@5458.84,6387.21 5467.34,6395.71 v1(5467.34,6412.79) C617.P$1@5467.34,6452.99 5507.65,6452.99 C605.P$1@5532.34,6477.68 5532.34,6561.14 R621.2@5543.88,6572.68
  Bottom w7: v1(5072.34,5534.07) 5287.34,5534.07 v1(5302.34,5519.07) ; v1(5282.65,5958.61) 5301.72,5977.68 v1(5492.34,5977.68) 5504.09,5989.43 5504.09,6060.66 5479.07,6085.68 5447.37,6085.68 5390.34,6142.71 5390.34,6227.65 5467.34,6304.65 v1(5467.34,6412.79) ; 5532.34,5892.68 5533.19,5893.53 v1(5546.47,5893.53) 5546.47,5873.55 5587.34,5832.68 5587.34,5790.84 5585.8,5792.37 v1(5578.74,5792.37)
VDD_3V3_SENSORS_EN: R603.P$2 R635.P$2 U101.2 U603.5 | length 2129
  Top w7: U101.2@4117.38,6929.22 4256.4,6929.22 4294.86,6967.68 4377.34,6967.68 4405.36,6939.66 4684.52,6939.66 4782.54,7037.68 4905.17,7037.68 5117.34,6825.51 5117.34,6708.28 5128.13,6697.49 5175.1,6697.49 5199.97,6722.36 5224.38,6722.36 5242.96,6703.78 5242.96,6681.3 5207.34,6645.68 5207.34,6293.3 5227.34,6273.3 R635.P$2@5282.65,6273.3 R603.P$2@5337.34,6273.3 5342.96,6273.3 5377.34,6307.68 5438.37,6307.68 U603.5@5458.84,6328.15
VDD_3V3_SPEKTRUM: C1008.P$1 D801.C J801.P$1 U1002.8 | length 1493.5
  Top w7: v1(4622.34,5957.68) 4637.34,5942.68 4797.34,5942.68 4803.84,5936.18 U1002.8@4803.84,5922.52
  Top w8: C1008.P$1@3688.4,5596.8 3688.4,5638.3 3689.43,5638.3 3697.34,5646.21 D801.C@3697.34,5651.8 3697.34,5752.68 3695.72,5759.18 v1(3693.28,5756.74)
  Bottom w7: v1(3693.28,5756.74) 3693.28,5768.62 3820.04,5895.39 3867.01,5895.39 3899.31,5927.68 3982.34,5927.68 4002.34,5947.68 4169.62,5947.68 4199.38,5917.92 4304.33,5917.92 4333.09,5946.68 4334,5946.68 4335,5947.68 4612.34,5947.68 v1(4622.34,5957.68)
  Bottom w8: J801.P$1@3693.28,5681.58 v1(3693.28,5756.74)
VDD_3V3_SPEKTRUM_EN: R1002.P$2 U801.2 U1002.5 | length 1136.7
  Top w7: U1002.5@4803.84,5863.46 4822.82,5863.46 4862.34,5823.94 R1002.P$2@4862.34,5817.99
  Top w8: U801.2@4380.92,5982.76 4380.92,6023.22 4388.69,6030.99 4427.34,6030.99 4483.07,6086.72 4543.86,6086.72 4582.64,6047.94 4582.64,6008.61 4595.61,5995.64 4635.29,5995.64 4660.75,5970.18 4709.63,5970.18 4727.5,5988.05 4727.5,6022.85 4743.65,6038.99 4898.71,6038.99 4927.62,6010.08 4927.62,5801.03 4910.81,5784.22 4870.49,5784.22 4862.34,5792.37 R1002.P$2@4862.34,5817.99
VDD_5V_BRICK: C1101.P$1 J601.1 J601.2 R1105.P$1 U1101.P$21 U1102.P$7 U1102.P$8 | length 2578.8
  Top w7: R1105.P$1@3645.48,7612.84 3667.02,7591.3 U1101.P$21@3667.02,7557.28
  Top w15: C1101.P$1@3582.38,7716.52 3639.36,7716.52 3672.84,7683.04 3672.84,7664.06 3680.06,7656.84 U1102.P$7@3705.48,7656.84 U1102.P$8@3705.48,7630.84 3687.48,7612.84 R1105.P$1@3645.48,7612.84
  Top w20: v1(3345.09,7413.47) 3345.09,7564.25 3492.11,7711.27 C1101.P$1@3582.34,7711.27
  Bottom w20: v1(3345.09,7413.47) v1@3345.23,7415.58 ; J601.1@3864.19,6277.68 J601.1@3856.76,6277.68 ; 3267.34,7337.68 3267.34,6992.68 3352.34,6992.68 3422.34,6922.68 3422.34,6437.68 3472.34,6387.68 3765.77,6387.68 3814.98,6338.47 J601.2@3814.98,6277.68 3814.98,6269.81 3826.11,6258.68 3845.63,6258.68 J601.1@3856.76,6269.81 ; 3267.34,7337.68 3344.11,7414.45 v1@3345.23,7415.58 ; 3267.34,7337.68 v1@3345.23,7415.58 ; J601.1@3856.76,6269.81 J601.1@3856.76,6277.68 ; J601.1@3856.76,6269.81 J601.1@3856.76,6277.68
VDD_5V_HIPOWER: C614.P$1 L201.P$1 U601.8 | length 1898.2
  Top w7: L201.P$1@5108.84,7801.93 5108.84,7868.67 v1(5127.34,7887.17) ; C614.P$1@5392.34,6812.68 5402.03,6812.68 v1(5442.03,6852.68) U601.8@5482.34,6852.68
  Top w15: C614.P$1@5392.34,6812.68 5432.34,6852.68 v1(5442.03,6852.68)
  Bottom w15: v1(5127.34,7887.17) 5562.85,7887.17 5631.55,7818.47 5631.55,6951.89 5577.34,6897.68 5477.34,6897.68 v1@5437.34,6857.68
VDD_5V_IN: C702.P$1 C1104.P$1 F1001.1 L603.P$1 L701.P$1 LED701.A LED704.A R609.P$2 RN1101.5 RN1101.6 RN1101.7 U601.1 U602.1 U702.3 U703.A1 U703.A2 U703.A3 U1101.P$12 U1102.P$5 U1102.P$6 U1103.P$5 U1103.P$6 U1104.P$5 U1104.P$6 | length 10340.8
  Top w7: v1(3352.34,7374.68) 3351.73,7373.56 3322.34,7402.95 3322.34,7569.08 3484.03,7730.77 3540.12,7730.77 3549.14,7739.8 3652.42,7739.8 3667.34,7724.88 3689.44,7724.88 U1102.P$5@3705.48,7708.84 U1102.P$6@3705.48,7682.84 ; U1101.P$12@3706.39,7407.68 v1(3735.01,7379.06) 3752.34,7361.73 3752.34,7291.97 3742.34,7281.97 RN1101.7@3727.78,7281.97 RN1101.6@3727.78,7262.29 RN1101.5@3727.78,7237.68 3810.32,7237.68 U1104.P$5@3811.48,7238.84 U1104.P$6@3837.48,7238.84 3837.48,7269 3847.34,7278.86 3860.02,7278.86 3874.25,7293.09 3898.16,7293.09 3912.34,7307.27 3912.34,7425.71 3900.37,7437.68 3872.34,7437.68 U1103.P$5@3871.34,7438.68 U1103.P$6@3871.34,7464.68 3965.95,7464.68 3980.48,7450.15 C1104.P$1@3980.48,7437.68 4026.72,7437.68 4062.34,7473.3 v1(4062.34,7612.68) ; LED701.A@4046.94,5262.99 4121.87,5262.99 LED704.A@4122.34,5263.46 4122.34,5268.14 4257.34,5268.14 4302.79,5222.68 4443.45,5222.68 4500.44,5279.67 4652.71,5279.67 4717.34,5344.3 4717.34,5362.68 4782.53,5427.87 4805.26,5427.87 ; R609.P$2@4248.13,6239.69 4248.13,6215.86 4262.81,6201.18 4430.02,6201.18 v1(4447.14,6184.06) v1@4447.34,6184.26 ; L701.P$1@4772.34,7557.45 4850.21,7557.45 C702.P$1@4852.34,7555.32 4880.54,7527.12 4880.54,7447.68 4871.35,7438.49 U702.3@4838.6,7438.49 4803.15,7438.49 4792.34,7427.68 4792.34,7380.28 4758.58,7346.52 4758.58,7321.72 4767.61,7312.68 4802.03,7312.68 4812.34,7302.37 4812.34,7280.78 4797.68,7266.13 4797.68,7209.37 v1(4811.84,7195.21) ; 4805.26,5427.68 4805.26,5427.87 ; F1001.1@4852.34,5427.56 4852.34,5457.68 v1(4857.34,5462.68) ; v1(5175.1,6535.51) 5195.34,6515.28 5195.34,6288.33 5230.18,6253.49 5359.51,6253.49 5435.32,6177.68 5496.98,6177.68 5652.34,6022.33 5652.34,5556.26 5518.64,5422.56 v1(5449,5422.56) ; v1(5312.03,6627.37) 5312.03,6552.99 5355.84,6509.18 L603.P$1@5397.34,6509.18 5397.34,6528.31 U602.1@5429.31,6560.28 ; v1(5372.93,6777.68) U601.1@5482.34,6777.88 ; 4805.26,5427.87 4827.34,5427.87 4805.33,5429.07 4805.26,5429.07 4805.26,5427.87
  Bottom w7: v1(3352.34,7374.68) 3361.45,7374.68 3432.34,7303.79 3492.84,7303.79 3536.95,7259.68 3582.72,7259.68 3610.34,7287.3 3610.34,7357.3 3650.9,7397.86 3716.21,7397.86 v1(3735.01,7379.06) ; v1(4062.34,7612.68) 4062.34,7787.68 4112.34,7837.68 4329.36,7837.68 4609.36,7557.68 v1(4812.93,7557.68) 4772.34,7557.45 ; v1(4811.84,7195.21) v1@4812.34,7195.7 ; v1(4857.34,5462.68) 4857.34,5332.68 4887.34,5302.68 4947.34,5302.68 4972.34,5327.68 4972.34,5373.14 5008.94,5409.74 5102.09,5409.74 5127.34,5384.49 5224.15,5384.49 5263.61,5423.95 5449,5423.95 v1(5449,5422.56) ; U703.A3@4895.41,6170.99 4895.41,6256.2 4999,6359.79 5089.05,6359.79 5102.09,6372.83 5102.09,6467.43 5262.03,6627.37 v1(5312.03,6627.37) 5312.82,6627.37 5372.93,6687.48 v1(5372.93,6777.68) 5342.93,6807.68 5342.93,7037.09 5242.34,7137.68 4862.34,7137.68 4812.34,7187.68 v1@4812.34,7195.7 ; v1@4812.34,7195.7 4812.34,7201.49 4813.13,7196.49 v1@4812.34,7195.7
  Bottom w8: v1(4447.14,6184.06) 4447.34,6184.26 4447.34,6227.68 4467.34,6247.68 4567.32,6247.68 4662.34,6152.66 4662.34,6101.22 4707.06,6056.49 4867.53,6056.49 U703.A1@4895.41,6084.37
  Bottom w20: U703.A1@4895.41,6084.37 U703.A2@4895.41,6127.68 U703.A3@4895.41,6170.99
VDD_5V_PERIPH: C618.P$1 L202.P$1 L203.P$1 L401.P$1 L402.P$1 L403.P$1 L404.P$1 U602.8 | length 8551.1
  Top w7: 5422.34,6635.08 U602.8@5429.31,6635.08
  Top w10: 4405.45,8082.68 4491.4,7996.73 4491.4,7912.68 4516.4,7887.68 4542.34,7887.68 4557.34,7872.68 4557.34,7756.77 4533.49,7732.92 4478.64,7732.92 4462.89,7748.67 L202.P$1@4462.89,7751.77
  Top w15: 5357.54,6614.77 5377.85,6635.08 5422.34,6635.08
  Top w20: v1(3167.34,6952.68) v1(3267.34,6952.68) ; L203.P$1@3323.84,7797.68 3326.34,7800.18 3338.76,7812.6 3338.76,7993.79 3427.65,8082.68 3848.13,8082.68 ; v1(3515.3,6303.18) 3515.3,6317.14 L404.P$1@3530.84,6332.68 ; v1(3972.34,7770.24) 3972.34,7778.07 3963.84,7786.57 3962.34,7792.68 3963.84,7792.68 L401.P$1@3963.84,7822.68 3963.84,7957.81 3848.13,8073.52 3848.13,8082.68 ; L403.P$1@5280.53,7550.47 5247.34,7517.28 5247.34,7447.68 5282.13,7412.89 5622.34,7412.89 5647.34,7437.89 ; C618.P$1@5357.54,6577.44 5357.54,6614.77 5357.54,6666.62 5277.34,6746.82 5277.34,6978.35 5316.67,7017.68 5602.34,7017.68 5647.34,7062.68 5647.34,7437.89 ; 3848.13,8082.68 4405.45,8082.68 5587.34,8082.68 5647.34,8022.68 5647.34,7437.89
  Bottom w20: v1(3167.34,6952.68) 3167.34,7352.68 3362.34,7547.68 3452.34,7547.68 3535.21,7630.55 3637.34,7630.55 3694.47,7687.68 3889.78,7687.68 ; v1(3267.34,6952.68) 3332.34,6952.68 3387.34,6897.68 3387.34,6431.14 v1(3515.3,6303.18) ; L402.P$1@3930.84,7347.68 3930.84,7541.61 3946.91,7557.68 3946.91,7630.55 3889.78,7687.68 ; v1(3972.34,7770.24) 3889.78,7687.68
VDD_5V_SENS: R609.P$1 R610.P$1 U101.29 | length 175.8
  Top w7: U101.29@4255.17,6397.72 4255.17,6344.72 4248.13,6337.68 R609.P$1@4248.13,6279.07 R610.P$1@4302.34,6279.07
VDD_SERVO: C1102.P$1 D904.ANODE J901.5 J901.8 J901.11 J901.14 J901.17 J901.20 J901.23 J901.26 J901.29 J901.32 J901.35 J901.38 J901.41 J901.44 J901.47 R922.P$2 R1109.P$1 U1101.P$20 U1103.P$7 U1103.P$8 | length 6075
  Top w7: v1@3392.73,7513 R1109.P$1@3415.79,7513 ; U1101.P$20@3686.71,7557.28 v1(3686.71,7590.28) ; U1103.P$7@3871.34,7490.68 U1103.P$8@3871.34,7516.68 3900.48,7545.82 C1102.P$1@3900.48,7630.44
  Top w25: J901.5@3157.34,5427.68 J901.8@3157.34,5527.68 J901.11@3157.34,5627.68 J901.14@3157.34,5727.68 J901.17@3157.34,5827.68 J901.20@3157.34,5927.68 J901.23@3157.34,6027.68 J901.26@3157.34,6127.68 J901.29@3157.34,6227.68 J901.32@3157.34,6327.68 J901.35@3157.34,6427.68 J901.38@3157.34,6527.68 J901.41@3157.34,6627.68 J901.44@3157.34,6727.68 J901.47@3157.34,6827.68 ; v1@3777.34,6066.59 3833.23,6122.48 D904.ANODE@3863.59,6122.48 ; v1@3782.34,6064.49 v1(3782.34,6062.68) 3782.34,6002.37 3791.03,5993.68 R922.P$2@3792.34,5993.68
  Bottom w25: J901.5@3157.34,5427.68 J901.8@3157.34,5527.68 J901.11@3157.34,5627.68 J901.14@3157.34,5727.68 J901.17@3157.34,5827.68 J901.20@3157.34,5927.68 J901.23@3157.34,6027.68 J901.26@3157.34,6127.68 J901.29@3157.34,6227.68 J901.32@3157.34,6327.68 J901.35@3157.34,6427.68 J901.38@3157.34,6527.68 J901.41@3157.34,6627.68 J901.44@3157.34,6727.68 J901.47@3157.34,6827.68 3157.34,6847.68 3217.34,6907.68 ; v1(3686.71,7590.28) 3674.94,7602.05 3652.1,7602.05 ; v1(3782.34,6062.68) 3761.47,6062.68 3711.47,6112.68 3637.34,6112.68 3557.34,6032.68 3372.34,6032.68 3347.34,6057.68 3347.34,6878.07 3317.73,6907.68 3217.34,6907.68 ; v1(3902.34,7590.28) 3839.94,7652.68 3702.73,7652.68 3652.1,7602.05 ; 3217.34,6907.68 3217.34,7345.28 3387.34,7515.28 3464.94,7515.28 3551.71,7602.05 3652.1,7602.05
  other v1: 3389.05,7512.68
VDD_SERVO_IN: L901.P$2 U1001.1 | length 1117.5
  Top w7: v1(3951.03,6006.32) 3960.98,6006.32 3969.94,6015.28 L901.P$2@3977.34,6015.28 ; v1(4622.34,5907.68) 4640.37,5907.68 4672.99,5875.06 4672.99,5826.72 4687.38,5812.33 4687.38,5721.74 U1001.1@4716.91,5692.21
  Bottom w7: v1(3951.03,6006.32) 3953.7,6006.32 3997.53,5962.49 4173.19,5962.49 4204.76,5930.92 4298.94,5930.92 4330,5961.98 4330,5962.49 4580.69,5962.49 4595.88,5977.68 4631.19,5977.68 4652.34,5956.54 4652.34,5937.68 v1(4622.34,5907.68)
VDD_SERVO_SENS: R918.P$1 R919.P$2 U801.14 | length 275.1
  Top w7: R918.P$1@3883.13,5950.99 R919.P$2@3943.44,5950.99 3943.44,5917.68 3966.95,5894.17 U801.14@4115.17,5894.17
pads on no net: J201.M$0 J201.M$1 J202.M$0 J202.M$1 J203.M$0 J203.M$1 J204.M$0 J204.M$1 J301.GND5 J301.GND6 J301.ID J302.M$0 J302.M$1 J401.M$0 J401.M$1 J402.M$0 J402.M$1 J403.M$0 J403.M$1 J404.M$0 J404.M$1 J405.M$0 J405.M$1 J601.M$0 J601.M$1 J701.M$0 J701.M$1 J702.M$0 J702.M$1 J801.P$4 J801.P$5 JX301.7 JX301.8 JX301.10 JX802.7 JX802.8 JX802.10 RN1101.1 RN1101.8 S601.A2 S601.B4 S801.A2 S801.B4 U101.16 U202.1 U202.3 U202.18 U202.20 U301.NC U301.NC1 U301.NC2 U301.NC3 U501.7 U502.7 U502.8 U505.2 U505.3 U505.4 U505.5 U505.6 U505.7 U505.11 U505.14 U505.15 U505.16 U505.17 U505.19 U505.21 U505.22 U506.4 U601.3 U602.3 U801.3 U801.4 U801.25 U801.32 U801.42 U801.43 U901.8 U901.9 U901.12 U901.13 U1001.3 U1101.P$11 U1101.P$22 U1101.P$23 X503.P$11 X503.P$12

## Polygon pours and split planes (outlines as drawn)
GND on Top "Top-GND" (solid, remove dead copper, pour order 4): 2980,8102.68 2982.32,8105 5660,8105 5660,5140 5655,5135 5645,5145 2985,5145
no net on Top "Top-No Net" (solid, pour order 0): 3122.34,6870.16
GND on Bottom "Bottom-GND" (solid, remove dead copper, pour order 6): 2985,8100 5647.32,8100 5650,8102.68 5655,8097.68 5655,5145 2990,5145 2985,5140

## Keep-outs
Keep-Out Layer:
  the board outline again, w10

## Silkscreen, mask and mechanical layers (free items; w line width, h text height)
Top Assembly:
  lines w20: 5292.34,6431.68 5420.34,6447.68 ; 5292.34,6463.68 5388.34,6447.68 ; 5340.34,6447.68 5276.34,6447.68 ; 5276.34,6447.68 5276.34,6479.68 5463.84,6452.9 5276.34,6426.11 5276.34,6447.68
Bottom Assembly:
  circle w12: c5022.88,6466.82 r25.59
  lines w11.81: 5022.88,6497.45 5022.88,6565.45
  lines w12: 5050.43,6466.82 5131.35,6466.82 ; 5131.35,6466.82 5112.04,6446.82 5112.04,6486.82 5131.35,6466.82 ; 5002.88,6557.45 5022.88,6577.45 5042.88,6557.45 5002.88,6557.45
  lines w16: 5006.34,6450.68 5038.34,6482.68 ; 5006.34,6482.68 5038.34,6450.68
  text "Y" at 4990.88,6536.82 h77.5
  text "Z" at 4964.7,6431.94 h77.5
  text "IO PWR" at 2872.34,5797.68 h25.5